# EAGLE board 7 Segment Display Peripheral (EAGLE 9.6.2)

Size 110 x 80 mm. Coordinates in mm from the lower left corner, seen from the top.
Outline: 0,0 110,0 110,80 0,80 0,0
Copper layers (1*16): Top 0.035mm / dielectric 1.5mm / Bottom 0.035mm
Design rules "default": minimum track width 6mil, minimum drill 0.35mm, track to track 6mil, track to pad 6mil, pad to pad 6mil, via to via 6mil, smd to smd 6mil, copper to edge 40mil, drill to drill 6mil, minimum pad ring 10mil, minimum via ring 8mil, stop-mask expansion 4mil, vias tented up to drill 0mil, thermal gap 10mil

## Footprints (pad centres in the part's own frame; a part is rotated, then mirrored left to right if it is on the bottom)
C050-024X044 = drill 0.813 octagon: 1 -2.54,0; 2 2.54,0
MAN6940 = drill 0.6: 1 -10.16,7.62; 2 -7.62,7.62; 3 -5.08,7.62; 4 -2.54,7.62; 5 0,7.62; 6 2.54,7.62; 7 5.08,7.62; 8 7.62,7.62; 9 10.16,7.62; 10 10.16,-7.62; 11 7.62,-7.62; 12 5.08,-7.62; 13 2.54,-7.62; 14 0,-7.62; 15 -2.54,-7.62; 16 -5.08,-7.62; 17 -7.62,-7.62; 18 -10.16,-7.62
DIL40 = drill 0.813 long: 1 -24.13,-7.62; 2 -21.59,-7.62; 3 -19.05,-7.62; 4 -16.51,-7.62; 5 -13.97,-7.62; 6 -11.43,-7.62; 7 -8.89,-7.62; 8 -6.35,-7.62; 9 -3.81,-7.62; 10 -1.27,-7.62; 11 1.27,-7.62; 12 3.81,-7.62; 13 6.35,-7.62; 14 8.89,-7.62; 15 11.43,-7.62; 16 13.97,-7.62; 17 16.51,-7.62; 18 19.05,-7.62; 19 21.59,-7.62; 20 24.13,-7.62; 21 24.13,7.62; 22 21.59,7.62; 23 19.05,7.62; 24 16.51,7.62; 25 13.97,7.62; 26 11.43,7.62; 27 8.89,7.62; 28 6.35,7.62; 29 3.81,7.62; 30 1.27,7.62; 31 -1.27,7.62; 32 -3.81,7.62; 33 -6.35,7.62; 34 -8.89,7.62; 35 -11.43,7.62; 36 -13.97,7.62; 37 -16.51,7.62; 38 -19.05,7.62; 39 -21.59,7.62; 40 -24.13,7.62
DIL16 = drill 0.813 long: 1 -8.89,-3.81; 2 -6.35,-3.81; 3 -3.81,-3.81; 4 -1.27,-3.81; 5 1.27,-3.81; 6 3.81,-3.81; 7 6.35,-3.81; 8 8.89,-3.81; 9 8.89,3.81; 10 6.35,3.81; 11 3.81,3.81; 12 1.27,3.81; 13 -1.27,3.81; 14 -3.81,3.81; 15 -6.35,3.81; 16 -8.89,3.81
DIL20 = drill 0.813 long: 1 -11.43,-3.81; 2 -8.89,-3.81; 3 -6.35,-3.81; 4 -3.81,-3.81; 5 -1.27,-3.81; 6 1.27,-3.81; 7 3.81,-3.81; 8 6.35,-3.81; 9 8.89,-3.81; 10 11.43,-3.81; 11 11.43,3.81; 12 8.89,3.81; 13 6.35,3.81; 14 3.81,3.81; 15 1.27,3.81; 16 -1.27,3.81; 17 -3.81,3.81; 18 -6.35,3.81; 19 -8.89,3.81; 20 -11.43,3.81

## Placement (x,y rotation side)
C1  [C050-024X044]  68.58,46.1 270 top
C2  [C050-024X044]  68.58,33.4 270 top
C3  [C050-024X044]  102.87,46.1 270 top
C4  [C050-024X044]  102.87,33.4 270 top
C5  [C050-024X044]  59.69,14.35 270 top
C6  [C050-024X044]  92.71,14.35 270 top
C7  [C050-024X044]  34.29,46.1 270 top
C8  [C050-024X044]  34.29,32.13 270 top
DP1  MAN6940  [MAN6940]  17.78,63.88 0 top
DP2  MAN6940  [MAN6940]  52.07,63.88 0 top
DP3  MAN6940  [MAN6940]  86.36,63.88 0 top
IC1  [DIL40]  30.48,14.35 180 top
IC2  74LS48N  [DIL16]  78.74,14.35 180 top
IC3  74HCT373N  [DIL20]  17.78,46.1 180 top
IC4  74HCT373N  [DIL20]  17.78,33.4 180 top
IC5  74HCT373N  [DIL20]  52.07,46.1 180 top
IC6  74HCT373N  [DIL20]  52.07,33.4 180 top
IC7  74HCT373N  [DIL20]  86.36,46.1 180 top
IC8  74HCT373N  [DIL20]  86.36,33.4 180 top

## Library data of the parts
C1-C8 = rcl; SPICEPREFIX: C
DP1-DP3 = MAN6940
IC1 = micro-intel; MF: INTERSIL; MPN: IP82C55AZ; OC_FARNELL: 1562050; OC_NEWARK: 79K6939
IC2 = 74xx-us
IC3-IC8 = 74xx-eu

## Nets
A: IC2.13 IC3.3 IC4.3 IC5.3 IC6.3 IC7.3 IC8.3
B: IC2.12 IC3.4 IC4.4 IC5.4 IC6.4 IC7.4 IC8.4
C: IC2.11 IC3.7 IC4.7 IC5.7 IC6.7 IC7.7 IC8.7
D: IC2.10 IC3.8 IC4.8 IC5.8 IC6.8 IC7.8 IC8.8
E: IC2.9 IC3.13 IC4.13 IC5.13 IC6.13 IC7.13 IC8.13
F: IC2.15 IC3.14 IC4.14 IC5.14 IC6.14 IC7.14 IC8.14
G: IC2.14 IC3.17 IC4.17 IC5.17 IC6.17 IC7.17 IC8.17
GND: C1.2 C2.2 C3.2 C4.2 C5.2 C6.2 C7.2 C8.2 DP1.13 DP1.14 DP2.13 DP2.14 DP3.13 DP3.14 IC1.7 IC2.8 IC3.10 IC4.10 IC5.10 IC6.10 IC7.10 IC8.10
N$1: DP1.17 IC3.16
N$2: DP1.18 IC3.15
N$3: DP1.1 IC3.12
N$4: DP1.2 IC3.9
N$5: DP1.3 IC3.6
N$6: DP1.15 IC3.5
N$7: DP1.16 IC3.2
N$8: DP1.11 IC4.2
N$9: DP1.10 IC4.5
N$10: DP1.8 IC4.6
N$11: DP1.6 IC4.9
N$12: DP1.5 IC4.12
N$13: DP1.12 IC4.15
N$14: DP1.7 IC4.16
N$43: DP2.17 IC5.16
N$44: DP2.18 IC5.15
N$45: DP2.1 IC5.12
N$46: DP2.2 IC5.9
N$47: DP2.3 IC5.6
N$48: DP2.15 IC5.5
N$49: DP2.16 IC5.2
N$50: DP2.11 IC6.2
N$51: DP2.10 IC6.5
N$52: DP2.8 IC6.6
N$53: DP2.6 IC6.9
N$54: DP2.5 IC6.12
N$55: DP2.12 IC6.15
N$56: DP2.7 IC6.16
N$57: DP3.17 IC7.16
N$58: DP3.18 IC7.15
N$59: DP3.1 IC7.12
N$60: DP3.2 IC7.9
N$61: DP3.3 IC7.6
N$62: DP3.15 IC7.5
N$63: DP3.16 IC7.2
N$64: DP3.11 IC8.2
N$65: DP3.10 IC8.5
N$66: DP3.8 IC8.6
N$67: DP3.6 IC8.9
N$68: DP3.5 IC8.12
N$69: DP3.12 IC8.15
N$70: DP3.7 IC8.16
PA0: IC1.4 IC2.7
PA1: IC1.3 IC2.1
PA2: IC1.2 IC2.2
PA3: IC1.1 IC2.6
VCC: C1.1 C2.1 C3.1 C4.1 C5.1 C6.1 C7.1 C8.1 IC1.26 IC2.16 IC3.20 IC4.20 IC5.20 IC6.20 IC7.20 IC8.20

## Tracks (layer width: path | path; a pad name or v marks a point on that pad's centre or on a via)
A  (6 unrouted)
B  (6 unrouted)
C  (6 unrouted)
D  (6 unrouted)
E  (6 unrouted)
F  (6 unrouted)
G  (6 unrouted)
GND  (21 unrouted)
N$1  (1 unrouted)
N$2  (1 unrouted)
N$3  (1 unrouted)
N$4  (1 unrouted)
N$5  (1 unrouted)
N$6  (1 unrouted)
N$7  (1 unrouted)
N$8  (1 unrouted)
N$9  (1 unrouted)
N$10  (1 unrouted)
N$11  (1 unrouted)
N$12  (1 unrouted)
N$13  (1 unrouted)
N$14  (1 unrouted)
N$43  (1 unrouted)
N$44  (1 unrouted)
N$45  (1 unrouted)
N$46  (1 unrouted)
N$47  (1 unrouted)
N$48  (1 unrouted)
N$49  (1 unrouted)
N$50  (1 unrouted)
N$51  (1 unrouted)
N$52  (1 unrouted)
N$53  (1 unrouted)
N$54  (1 unrouted)
N$55  (1 unrouted)
N$56  (1 unrouted)
N$57  (1 unrouted)
N$58  (1 unrouted)
N$59  (1 unrouted)
N$60  (1 unrouted)
N$61  (1 unrouted)
N$62  (1 unrouted)
N$63  (1 unrouted)
N$64  (1 unrouted)
N$65  (1 unrouted)
N$66  (1 unrouted)
N$67  (1 unrouted)
N$68  (1 unrouted)
N$69  (1 unrouted)
N$70  (1 unrouted)
PA0  (1 unrouted)
PA1  (1 unrouted)
PA2  (1 unrouted)
PA3  (1 unrouted)
VCC  (15 unrouted)